# Altium PCB PCB3.PcbDoc
Units mil, origin at the board's own origin, x right, y up, seen from the top; angles counter-clockwise.
Board outline 6000 x 4000 mil, 2 copper layers (Top Layer, Bottom Layer); 73 components, 49 nets, 212 pads, 52 vias.
Unrouted connection lines stored in the file: 2.
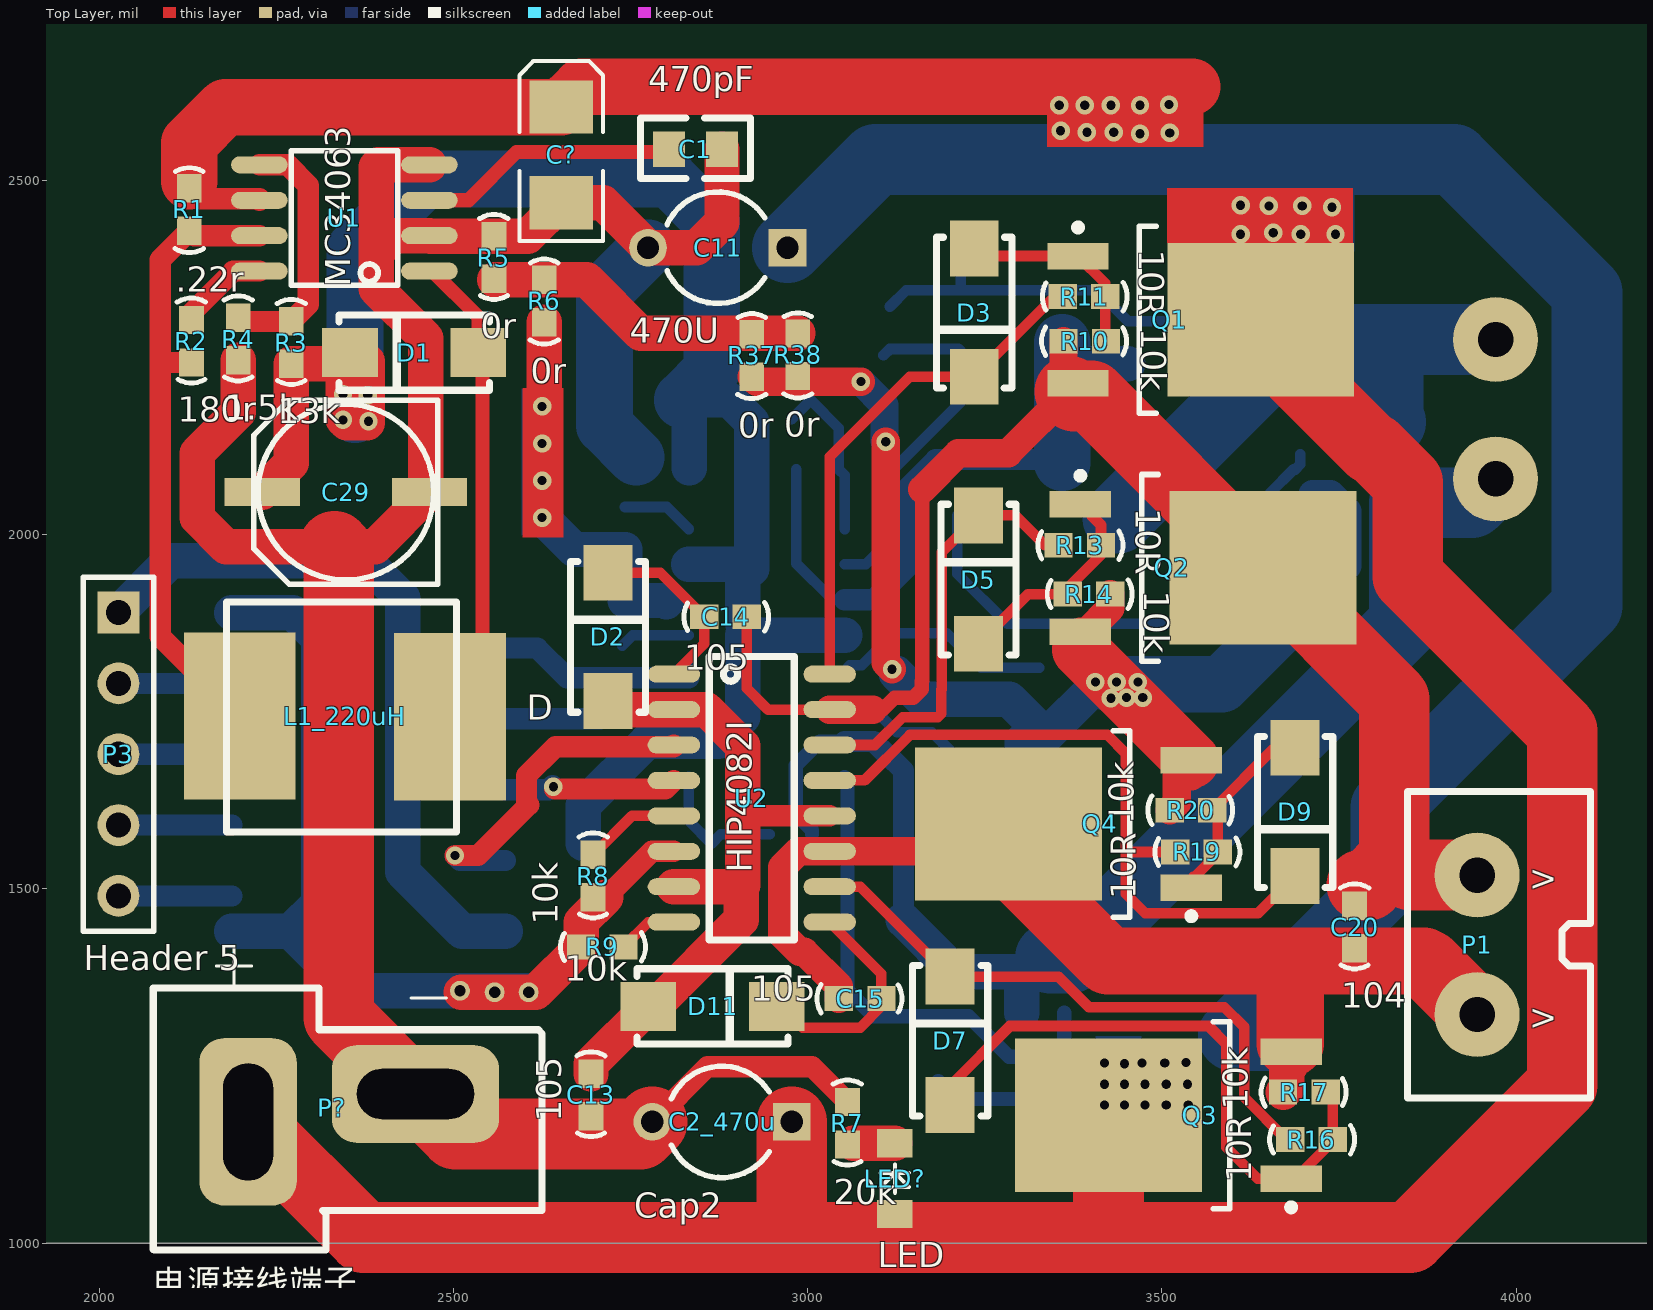
[diagram p0: Top Layer view]
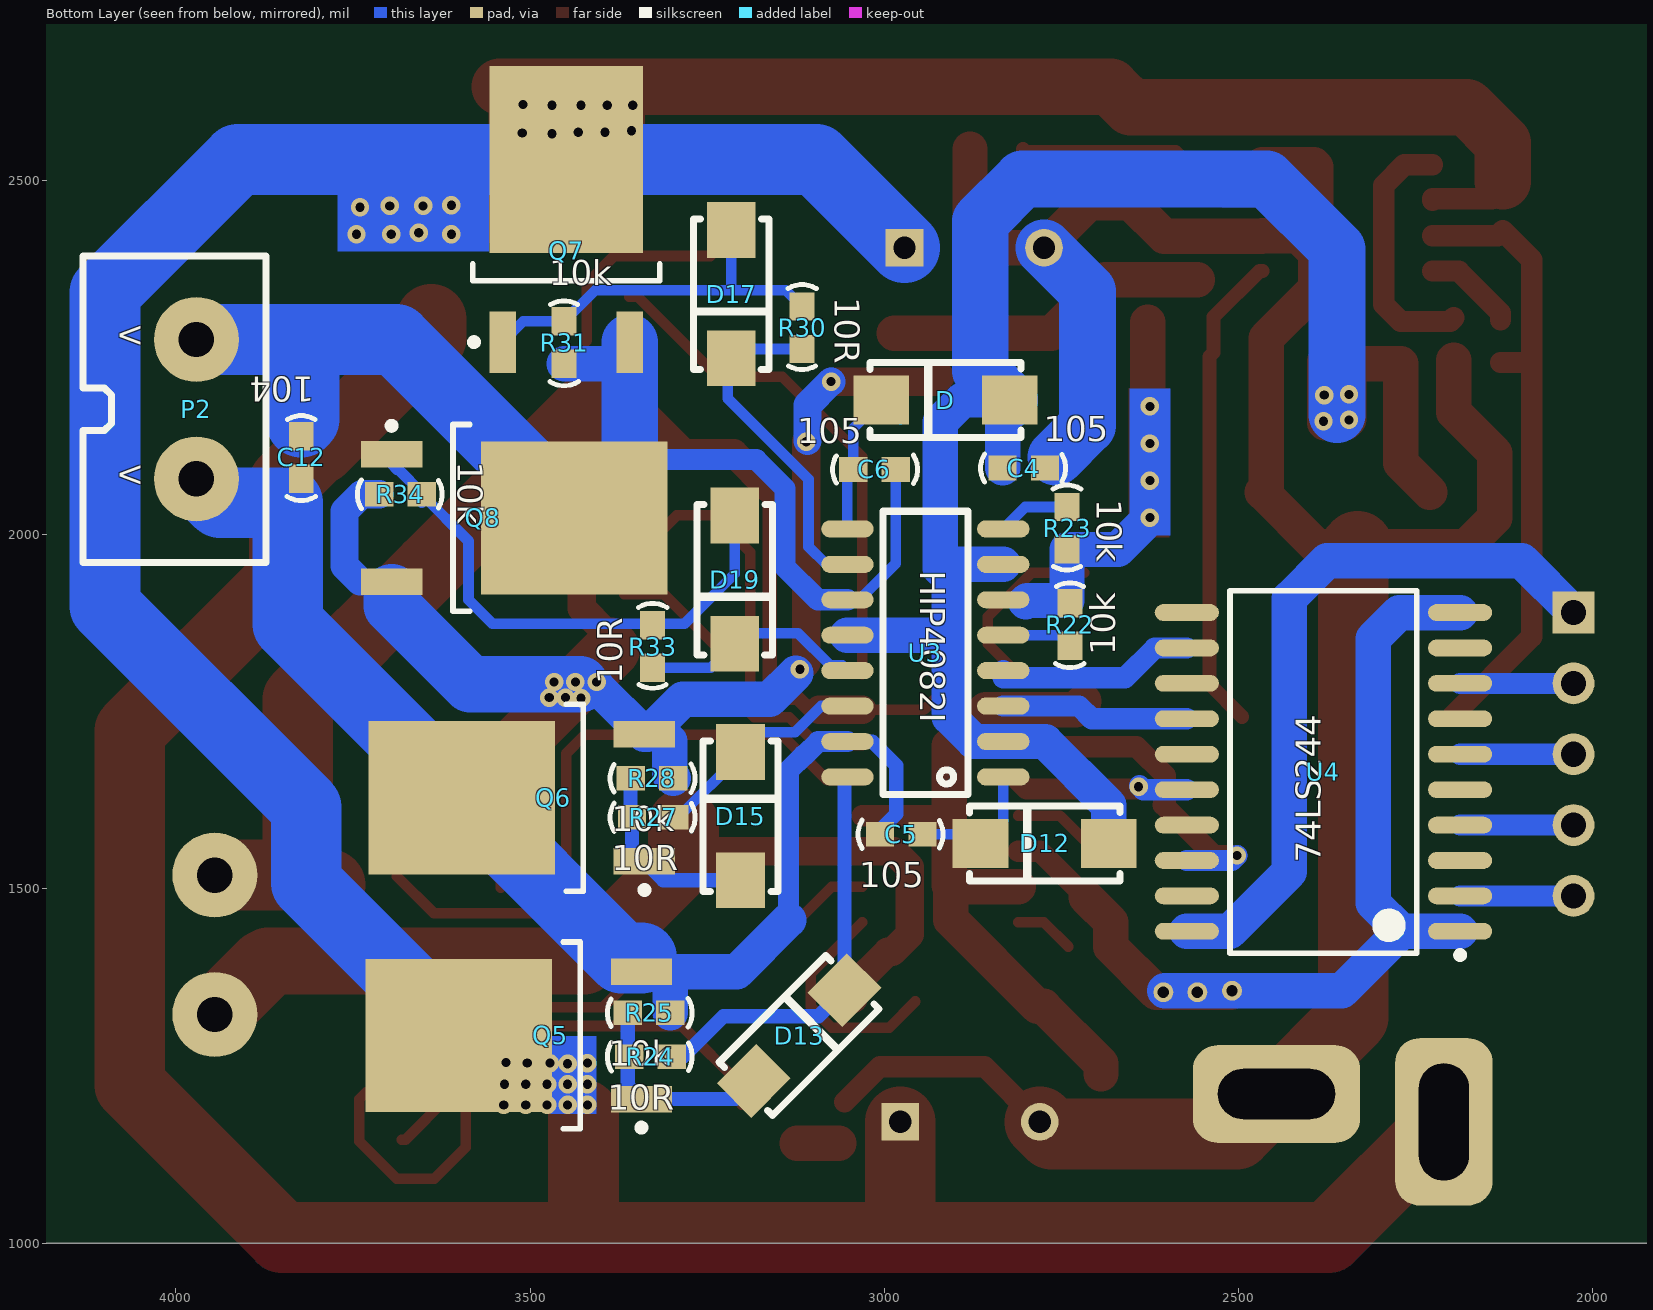
[diagram p1: Bottom Layer view, seen from below]
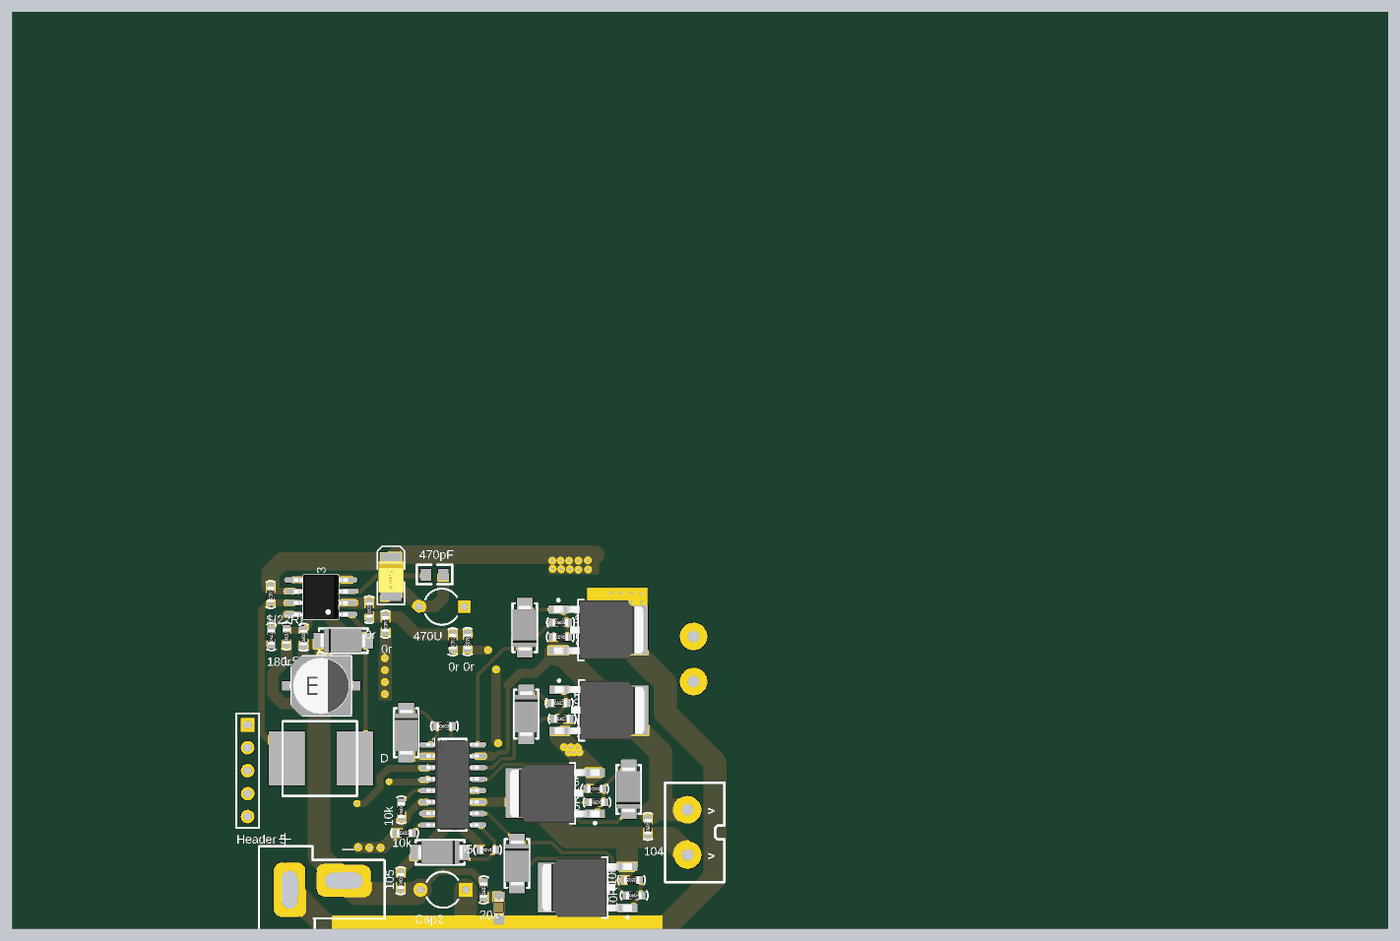
[diagram p2: 3D render of the assembled board from above, using the file's embedded part models]
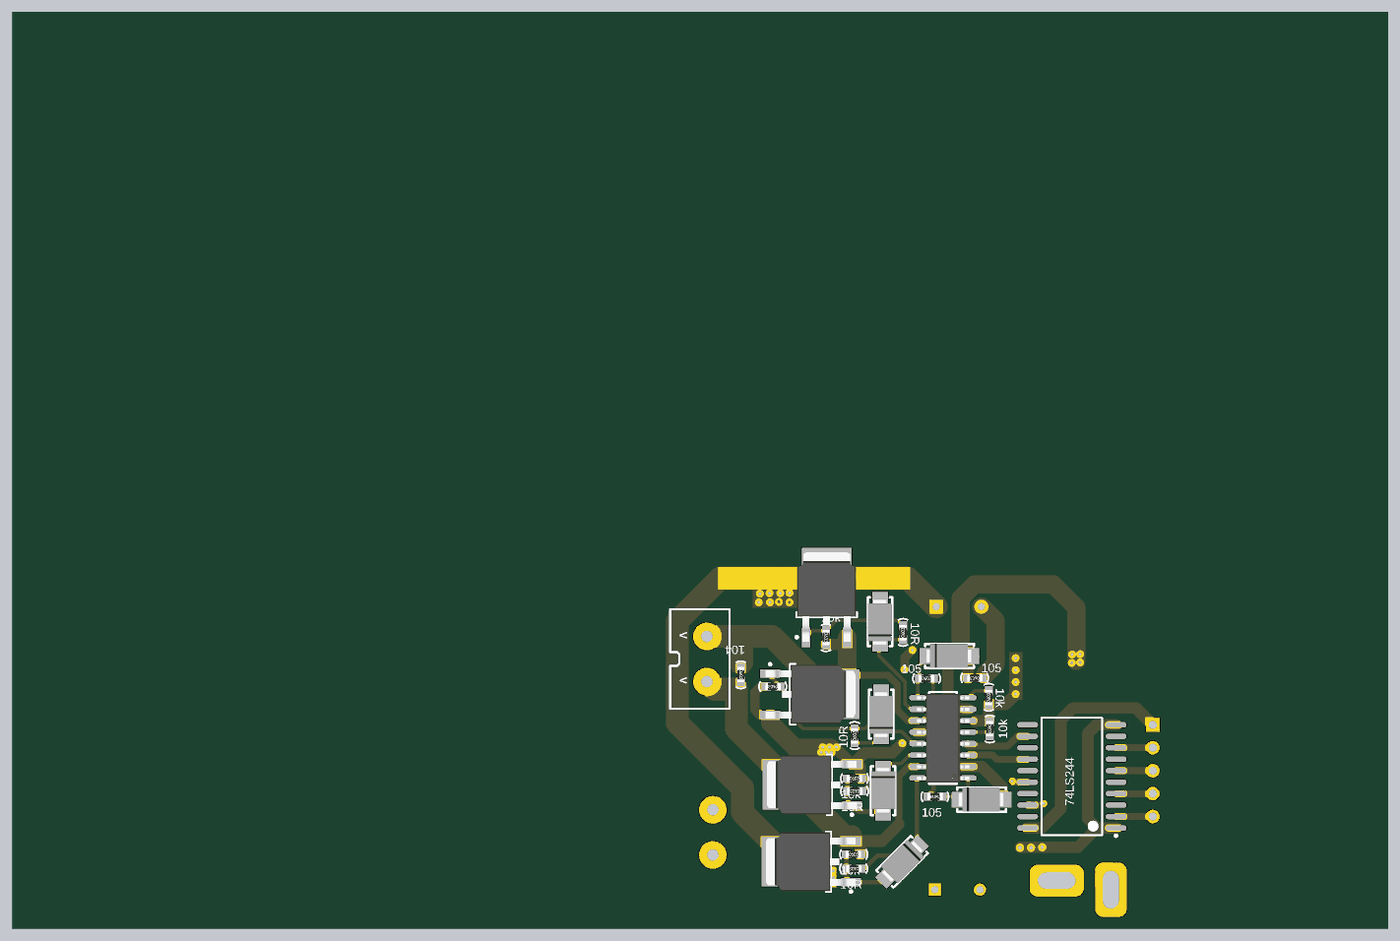
[diagram p3: 3D render of the assembled board from below, using the file's embedded part models]

## Layer stack, top to bottom
Top Solder: solder mask 0.4, Solder Resist, Dk 3.5
Top Layer: signal copper 1.4
Dielectric 1: dielectric 12.6, FR-4, Dk 4.8
Bottom Layer: signal copper 1.4
Bottom Solder: solder mask 0.4, Solder Resist, Dk 3.5

## Board outline
1000,1000 7000,1000 7000,5000 1000,5000

## Design rules (kind name [scope] priority, off if disabled: settings)
Clearance [All] p1: gap=10
PolygonConnect [All] p1: connectstyle=Relief reliefconductorwidth=10 reliefentries=4 polygonreliefangle="90 Angle" airgapwidth=10
RoutingVias [All] p1: holewidth=28 width=50 viastyle="Through Hole" minholewidth=28 minwidth=50 maxholewidth=28 maxwidth=50
SolderMaskExpansion [All] p1: expansion=4
Width [All] p1: maxlimit=150 minlimit=10 preferedwidth=10 minimp=50.000000 maximp=50.000000 favimp=50.000000
30 further rules are at their usual default settings.

## Components (designator, comment, footprint, x,y, rotation, side; value= is the part's Value field where it differs from the comment)
C1 "470pF" 0805 2804,2544 r0 top
C2_470u "Cap2" CAPR5-4X5 2879,1171 r180 top
C4 "105" 0603 2798,2094 r0 bottom
C5 "105" 0603 2971,1577 r0 bottom
C6 "105" 0603 3019,2092 r180 bottom
C11 "470U" CAPR5-4X5 2873,2405 r180 top
C12 "104" 0603 3823,2114 r270 bottom
C13 "105" 0603 2694,1204 r90 top
C14 "105" 0603 2879,1884 r0 top
C15 "105" 0603 3079,1345 r180 top
C20 "104" 0603 3772,1441 r90 top
C29 "" ED6.3 2348,2060 r0 top
C? "" "pol cap(10uF)" 2582,2416 r90 top
D "二极管" 二极管 2918,2190 r0 bottom
D1 "二极管" 二极管 2440,2257 r180 top
D2 "D" 二极管 2718,1860 r90 top
D3 "二极管" 二极管 3235,2309 r270 top
D5 "二极管" 二极管 3241,1941 r90 top
D7 "二极管" 二极管 3201,1290 r90 top
D9 "二极管" 二极管 3688,1604 r270 top
D11 "二极管" 二极管 2870,1334 r0 top
D12 "二极管" 二极管 2778,1564 r0 bottom
D13 "二极管" 二极管 3117,1296 r135 bottom
D15 "二极管" 二极管 3203,1607 r90 bottom
D17 "二极管" 二极管 3216,2335 r270 bottom
D19 "二极管" 二极管 3211,1932 r270 bottom
L1_220uH "Inductor" 电感8*8 2198,1744 r90 top
LED? "LED" LED(0805) 3123,1091 r90 top
P1 "" 接线端子 3840,1201 r90 top
P2 "" 接线端子 3866,2397 r270 bottom
P3 "Header 5" HDR1X5 2027,1890 r270 top
P? "电源接线端子" T型接头 2315,1201 r0 top
Q1 "IR7843" "TO-252  mos管" 3554.81,2303.49 r0 top
Q2 "IR7843" "TO-252  mos管" 3558,1953 r0 top
Q3 "IR7843" "TO-252  mos管" 3509.19,1180.51 r180 top
Q4 "IR7843" "TO-252  mos管" 3368.19,1591.51 r180 top
Q5 "IR7843" "TO-252  mos管" 3516,1293 r0 bottom
Q6 "IR7843" "TO-252  mos管" 3511.81,1628.49 r0 bottom
Q7 "IR7843" "TO-252  mos管" 3449,2445 r90 bottom
Q8 "IR7843" "TO-252  mos管" 3522.19,2023.51 r180 bottom
R1 ".22r" 0603 2127,2464 r270 top
R2 "180r" 0603 2130,2268 r90 top
R3 "13k" 0603 2271,2266 r90 top
R4 "1.5k" 0603 2196,2271 r90 top
R5 "0r" 0603 2557,2386 r90 top
R6 "0r" 0603 2628,2335 r270 top
R7 "20k" 0603 3056,1164 r90 top
R8 "10k" 0603 2697,1513 r90 top
R9 "10k" 0603 2705,1418 r0 top
R10 "10k" 0603 3396,2273 r180 top
R11 "10R" 0603 3385,2336 r0 top
R13 "10R" 0603 3379,1985 r0 top
R14 "10k" 0603 3392,1916 r0 top
R16 "10R" 0603 3706,1146 r0 top
R17 "10k" 0603 3706,1213 r180 top
R19 "10R" 0603 3544,1552 r0 top
R20 "10k" 0603 3546,1611 r180 top
R22 "10k" 0603 2738,1878 r270 bottom
R23 "10k" 0603 2742,2004 r90 bottom
R24 "10R" 0603 3325,1263 r0 bottom
R25 "10k" 0603 3337,1325 r180 bottom
R27 "10R" 0603 3321,1601 r0 bottom
R28 "10k" 0603 3333,1656 r180 bottom
R30 "10R" 0603 3116,2287 r90 bottom
R31 "10k" 0603 3452,2276 r270 bottom
R33 "10R" 0603 3327,1837 r90 bottom
R34 "10k" 0603 3678,2057 r0 bottom
R37 "0r" 0603 2921,2258 r270 top
R38 "0r" 0603 2986,2259 r270 top
U1 "MC34063" SO8NB 2346,2447 r90 top
U2 "HIP4082I" HIP4082I 2921,1643 r0 top
U3 "HIP4082I" HIP4082I 2942,1818 r0 bottom
U4 "74LS244" 74LS244D 2380,1665 r0 bottom

## Footprints (in the part's own frame and the unit in brackets; to place one, negate y for a bottom-side part, rotate by r counter-clockwise, add the part's x,y. Pads: shape width x height; smd on the part's side, far side on the other; paste and mask are expansions set on the pad)
74LS244D [mm] "SOP-20"
  oval 2.3x0.6 smd: 1(-4.9,5.715) 2(-4.9,4.445) 3(-4.9,3.175) 4(-4.9,1.905) 5(-4.9,0.635) 6(-4.9,-0.635) 7(-4.9,-1.905) 8(-4.9,-3.175) 9(-4.9,-4.445) 10(-4.9,-5.715) 11(4.9,-5.715) 12(4.9,-4.445) 13(4.9,-3.175) 14(4.9,-1.905) 15(4.9,-0.635) 16(4.9,0.635) 17(4.9,1.905) 18(4.9,3.175) 19(4.9,4.445) 20(4.9,5.715)
  silkscreen extent -5.02,-6.5 3.35,6.69, body extent -3.8,-6.5 3.8,6.5, height 2.65
0603 [mil]
  rect 40x35 smd: 1(-25,0) 2(35,0)
  silkscreen extent -54,-20 66,20, body extent -28,-16 38,16, height 22
0805 [mil] "Chip Inductor, Body 0.6x0.3mm, IPC High Density"
  rect 45x50 smd: 1(0,0) 2(75,0)
  silkscreen extent -40,-41 115,44
CAPR5-4X5 [mm] "Capacitor; 2 Leads"
  rect 1.35x1.35 hole 0.8: 1(-2.5,0)
  round 1.35 hole 0.8: 2(2.5,0)
  silkscreen extent -1.69,-2 1.82,2
ED6.3 [mm]
  rect 2.7x1 smd: 1(-3,0) 2(3,0)
  silkscreen extent -3.3,-3.3 3.3,3.3, body extent -3.5,-3.3 3.5,3.3, height 5.2
HDR1X5 [mm] "Connector; Header; 5 Position"
  rect 1.5x1.5 hole 0.9: 1(0,0)
  round 1.5 hole 0.9: 2(2.54,0) 3(5.08,0) 4(7.62,0) 5(10.16,0)
  silkscreen extent -1.27,-1.27 11.43,1.27
HIP4082I [mil]
  oval 74x24 smd: 1(-110,160) 2(-110,110) 3(-110,60) 4(-110,10) 5(-110,-40) 6(-110,-90) 7(-110,-140) 8(-110,-190) 9(110,-190) 10(110,-140) 11(110,-90) 12(110,-40) 13(110,10) 14(110,60) 15(110,110) 16(110,160)
  silkscreen extent -60,-215 60,185, body extent -115,-207 113,179, height 69
LED(0805) [mil]
  rect 40x50 smd: 1(-50,0) 2(50,0)
  silkscreen extent -20,-20 20,20, body extent -37,-24 43,25, height 43
"pol cap(10uF)" [mil]
  rect 75x90 smd: 1(187.5,-70) 2(52.5,-70)
  silkscreen extent -1,-129 253,-11, body extent 51,-125 189,-15, height 75
SO8NB [mil]
  oval 24x80 smd: 1(-75,-120) 2(-25,-120) 3(25,-120) 4(75,-120) 5(75,120) 6(25,120) 7(-25,120) 8(-75,120)
  silkscreen extent -95,-75 95,75, body extent -97,-118 96,118, height 61
"TO-252  mos管" [mm]
  rect 2.2x0.95 smd: 1(-4.4,2.28) 3(-4.4,-2.28)
  rect 6.7x5.5 smd: 2(2.15,0)
  silkscreen extent -4.52,-3.35 -1.6,3.43, body extent -4.9,-3.27 5.04,3.27, height 2.39
T型接头 [mm]
  rrect50% 3.5x6 hole 1.8 slot 4.2 at 90 deg: 1(-2.667,-0.762)
  rrect50% 6x3.5 hole 1.8 slot 4.2 at 0 deg: 2(3.333,0.238)
  silkscreen extent -6.07,-5.36 7.87,5.46
二极管 [mm] "SS-14/M7"
  rect 2x1.75 smd: 1(-2.413,0) 2(2.187,0)
  silkscreen extent -2.81,-1.35 2.59,1.35, body extent -2.61,-1.34 2.49,1.33, height 2.12
接线端子 [mil]
  round 120 hole 50: 1(121.57,-105) 2(318.43,-105)
  silkscreen extent 3,-265 437,-7
电感8*8 [mm]
  rect 6x4 smd: 1(0,0) 2(-0.025,-7.544)
  silkscreen extent -4.17,-7.77 4.09,0.48

## Part data
C1: library part Cap, "Capacitor"
C2_470u: "Capacitor"
C4 C5 C6 C12 C13 C14 C15 C20: library part Cap, "无极电容"
C11: library part Cap2, "Capacitor"
C29: library part 固态贴片电容, "ED8:470UF  ED6.3:100UF"
C?: library part "pol cap", "通用有极电容"
D2: library part 二极管
LED?: "发光二极管"
P1 P2: library part 接线端子
P3: "Header, 5-Pin"
P?: "电源线"
Q1 Q2 Q3 Q4 Q5 Q6 Q7 Q8: library part NMOS-2, "N-Channel Power MOSFET"
R1 R2 R3 R4 R5 R6 R7 R8 R9 R10 R11 R13 R14 R16 R17 R19 R20 R22 R23 R24 R25 R27 R28 R30 R31 R33 R34 R37 R38: library part R

## Free pads (board coordinates)
  round 28 hole 16: 0(2509,1356) 1(2558,1354) 2(2606,1354)

## Via types
v1: diameter 26, hole 13, Top Layer to Bottom Layer, 52 vias

## Nets (pads, with @x,y where several pads share a name; then routed paths per layer and width w, separated by ;. In a path a pad name is that pad's centre, name@x,y a point inside that pad or via, vN(x,y) a via of type N, cw(c..) or ccw(c..) an arc to the next point about the centre after c; other vN are vias at no path point)
5V: P3.1 U4.20 | length 1018.9
  Bottom Layer w50: P3.1 2100,1963 2375,1963 2428,1910 2428,1524 2512,1440 U4.20
12V: C4.2 C13.2 C29.1 D1.2 D2.1 D11.1 D12.1 D.1 R3.1 U2.2 U2.7 U2.12 U3.2 U3.7 U3.12 | length 3759.3
  Top Layer w30: 2914,1603 U2.12
  Top Layer w50: C29.1 2271,2101.11 R3.1 D1.2@2324.9,2241 ; C13.2 2694,1253 D11.1 2783.47,1334 2906,1456.53 2906,1503 ; D2.1 2730,1753 U2.2 2857,1753 2908,1702 2908,1609 ; U2.7 2906,1503 ; 2914,1603 2908,1609 ; 2906,1503 2908,1505 2908,1609 ; v1@2344,2163 v1(2344,2198) 2344,2247.1 D1.2 2366,2257 2378,2245 2378,2158 2349,2158 v1@2344,2163
  Bottom Layer w50: D12.1 2683,1618 2773,1708 U3.2 2873.47,1708 2908,1742.53 2908,1858 U3.12 ; D.1 D.1@2833,2190 ; U3.7 2915,1958 2908,1951 2908,1875 2921,1862 ; C4.2 D.1@2833,2190 ; 2921,1952 2921,2159 2890,2190 D.1@2833,2190
  Bottom Layer w80: 2361,2169 2361,2403 2460,2502 2804.85,2502 2864.57,2442.28 2864.57,2231.57 D.1
  other v1: 2380,2160 2344,2162 2379,2197
AGND: C1.2 C2_470u.2 C4.1 C11.2 C13.1 C29.2 C?.2 P?.2 R4.1 R5.2 R7.2 U1.2 U1.4 | length 3794.8
  Top Layer w30: C2_470u.2 2858.57,1249 3006,1249 R7.2
  Top Layer w50: R4.1 2196,2173 2138,2115 2138,2024 2179,1983 2332,1983 2389.11,1983 C29.2 2460.63,2065.48 2460.63,2277.37 2391,2347 2391,2398 ; U1.4 2394,2522 2391,2519 2391,2398 ; C13.1 2702,1171 C2_470u.2 ; C1.2 2879,2441 2843,2405 C11.2 2711.07,2468.5 C?.2 2604.5,2421 R5.2 2467,2421 U1.2 2415,2422 2391,2398
  Top Layer w100: 2332,1983 2338,1977 2338,1318.59 P?.2 2502.59,1154 2763.57,1154 C2_470u.2
  Bottom Layer w80: C4.1@2758,2109 2713,2154 2713,2343.43 C11.2
DGND: pad.0 pad.1 pad.2 R6.2 R8.1 R9.1 R22.1 R23.1 U2.6 U3.6 U4.1 U4.10 | length 1810.7
  Top Layer w30: 2715,1488 2780,1553 U2.6
  Top Layer w50: pad.0@2511,1354 pad.1 pad.2 2616,1354 R9.1 2680,1453 2715,1488 ; v1@2628,2184 R6.2
  Bottom Layer w30: R22.1 R22.1@2742,1907
  Bottom Layer w50: U4.1 2270,1440 ; U4.10 2273,1890 2310,1853 2310,1480 2270,1440 ; pad.2@2604,1356 pad.0 2354,1356 2270,1440 ; v1(2625,2024) 2670,1979 R23.1 2742,1907 2798.15,1907 U3.6@2800.15,1905
  other v1: 2625,2076.33 2625,2128.67 2625,2181
GND: R5.1 R6.1 R37.1 R38.1 | length 460.9
  Top Layer w20: R5.1 R5.1@2558,2362
  Top Layer w50: R5.1@2558,2360 R6.1 2688,2360 2764,2284 R38.1
NetC1_1: C1.1 U1.3 | length 367.8
  Top Layer w20: U1.3 2521,2472 2589,2540 2800,2540 C1.1
NetC5_1: C5.1 D12.2 U3.1 | length 194.6
  Bottom Layer w15: U3.1 2832,1596.1 D12.2 2877.1,1577 C5.1
NetC5_2: C5.2 C12.2 P2.2 Q5.3 Q6.2 R25.2 U3.15 | length 1779.3
  Bottom Layer w20: C5.2 3006,1582.78 2983,1605.78 2983,1674 3017,1708 U3.15
  Bottom Layer w30: U3.15 3093.04,1708 3112.54,1688.5 3113.5,1688.5 3135,1667 3135,1456
  Bottom Layer w50: 3135,1456 3208.24,1382.76 3312.76,1382.76 3302,1372 R25.2
  Bottom Layer w100: 3342.77,1402.5 3370.47,1402.5 Q6.2 3842,1874.03 3842,2045 3937.43,2045 P2.2
NetC6_1: C6.1 D.2 U3.9 | length 240.2
  Bottom Layer w15: D.2@2977,2162.9 D.2 3044,2150.1 C6.1 3052,2084 U3.9
NetC6_2: C6.2 C12.1 P2.1 Q7.3 Q8.2 R31.2 U3.11 | length 1665.9
  Bottom Layer w15: C6.2 2984,1959.28 3035.28,1908 U3.11
  Bottom Layer w30: U3.11 3094,1908 3140,1954 3140,2065.17 3180.83,2106 3355.05,2106 Q8.2@3359.24,2101.82
  Bottom Layer w50: 3390.01,2241 R31.2
  Bottom Layer w80: Q8.2@3359.24,2101.82 Q7.3
  Bottom Layer w100: Q8.2 3689.46,2275.43 3819,2275.43 ; 3823,2159 3819,2163 3819,2275.43 ; P2.1 3819,2275.43
NetC14_1: C14.1 D2.2 U2.1 | length 260.5
  Top Layer w15: D2.2 2791.9,1946.1 C14.1 2854,1846 U2.1
NetC14_2: C14.2 C20.2 P1.2 Q1.3 Q2.2 R10.2 U2.15 | length 2037.1
  Top Layer w15: C14.2 2914,1783 2944,1753 U2.15
  Top Layer w20: 3091.74,1753 3105.88,1753 3122.66,1769.78 3149,1769.78 3161,1781.78 3161,1793.13 3161.55,1793.68 3161.55,2063.9
  Top Layer w40: U2.15 3091.74,1753 ; 3161.55,2063.9 3212.65,2115 3282.86,2115 3369.75,2201.89 Q1.3 3361,2234.31 R10.2
  Top Layer w100: Q1.3@3369.75,2201.89 3376.15,2195.5 3400.15,2195.5 Q2.2 3828,1767.65 3828,1528 ; 3782.45,1505.55 3791,1505.55 3828,1542.55 ; 3851.12,1519.43 P1.2
NetC15_1: C15.1 D11.2 U2.9 | length 324.9
  Top Layer w15: D11.2@2956.1,1341 2993.1,1304 3074,1304 3104,1334 C15.1 3104,1380 U2.9
NetC15_2: C15.2 C20.1 P1.1 Q3.3 Q4.2 R17.2 U2.11 | length 1506.8
  Top Layer w40: C15.2 3044,1362.35 2995.35,1411 2988.6,1411 2964,1435.6 2964,1530.4 2986.6,1553 U2.11 Q4.2@3245.03,1553
  Top Layer w50: R17.2 3676,1218 3676,1245 3681,1250 Q3.3@3681,1281.82
  Top Layer w95: Q4.2@3283.54,1538.46 3423.95,1398.05 3679,1398.05 ; Q3.3@3681,1281.82 3681,1396.05 3679,1398.05 ; 3875.57,1392 3869.53,1398.05 3679,1398.05
  Top Layer w100: Q4.2@3283.54,1538.46 Q4.2 ; 3875.57,1392 P1.1
NetD1_1: D1.1 L1_220uH.2 U1.1 | length 681.5
  Top Layer w20: U1.1 2470,2372 2535,2307 D1.1 2541,2251 2541,1789 L1_220uH.2
NetD3_1: D3.1 Q1.1 R10.1 R11.2 | length 287.6
  Top Layer w15: D3.1 3245.75,2393.25 Q1.1 3420,2354.84 R11.2 3420,2274 R10.1
NetD3_2: D3.2 R11.1 U2.16 | length 729.6
  Top Layer w15: U2.16 3031,2110 3143.9,2222.9 D3.2 3348.1,2336 R11.1
NetD5_1: D5.1 Q2.1 R13.2 R14.1 | length 313.3
  Top Layer w15: D5.1 3311,1916 R14.1 3367,1924.75 3414,1971.75 R13.2 3414,2013.54 Q2.1
NetD5_2: D5.2 R13.1 U2.14 | length 607.7
  Top Layer w15: U2.14 3094.77,1703 3134.05,1742.28 3183.31,1742.28 3188.5,1747.47 3188.5,1781.18 3189.05,1781.74 3189.05,1975.15 D5.2 3292.9,2027.1 3335,1985 R13.1
NetD7_1: D7.1 Q3.1 R16.2 R17.1 | length 872
  Top Layer w15: D7.1 3201,1221.88 3285.4,1306.28 3565.72,1306.28 3591,1281 3591,1135 3635.25,1090.75 Q3.1 3688,1090.75 3741,1143.75 R16.2 3741,1203 R17.1
NetD7_2: D7.2 R16.1 U2.10 | length 856
  Top Layer w15: U2.10 3074.1,1503 D7.2 3353.97,1376.1 3397.03,1333.05 3587.95,1333.05 3616,1305 3616,1205.75 3675.75,1146 R16.1
NetD9_1: D9.1 Q4.1 R19.2 R20.1 | length 282.9
  Top Layer w15: Q4.1 3541.42,1514.42 3544,1517 3546.25,1517 3579,1549.75 R19.2 3579,1603 R20.1 3659,1699 D9.1
NetD9_2: D9.2 R19.1 U2.13 | length 997.1
  Top Layer w15: U2.13 3080.12,1653 3144.06,1716.94 ; 3144.4,1717.28 3422.68,1717.28 3449,1690.96 3449,1557 ; R19.1 3454,1552 3449,1557 ; D9.2 3635.65,1465.55 3476.45,1465.55 3449,1493 3449,1557
NetD13_1: D13.1 Q5.1 R24.2 R25.1 | length 298.9
  Bottom Layer w20: D13.1 3209.76,1203.24 Q5.1 3362,1222.46 R25.1
NetD13_2: D13.2 R24.1 U3.16 | length 585.6
  Bottom Layer w20: U3.16 3056.12,1653.88 D13.2 3093,1320 3227,1320 3284,1263 R24.1
NetD15_1: D15.1 Q6.1 R27.2 R28.1 | length 272
  Bottom Layer w20: D15.1 3311.86,1512 Q6.1 3356,1556.14 R27.2 3358,1603 R28.1
NetD15_2: D15.2 R27.1 U3.14 | length 311.6
  Bottom Layer w15: U3.14 3089,1758 3126,1721 3175.1,1721 D15.2 3203,1688.75 3290.75,1601 R27.1
NetD17_1: D17.1 Q7.1 R30.2 R31.1 | length 548.5
  Bottom Layer w15: R30.2 3139,2345 3214,2345 ; D17.1 3216,2347 3214,2345 ; Q7.1 3509.54,2301 R31.1 3408,2345 3214,2345
NetD17_2: D17.2 R30.1 U3.10 | length 504.6
  Bottom Layer w15: U3.10 3082,1958 3107,1983 3107,2078.14 3221,2192.14 3221,2253.9 3212.9,2262 R30.1 R30.1@3107,2253
NetD19_1: D19.1 Q8.1 R33.2 R34.1 | length 765
  Bottom Layer w15: D19.1 3211,1945 3282,1874 3552.94,1874 3586.93,1908 3586.93,1990.93 R34.1 ; R34.1@3653,2045 R34.1 ; Q8.1 3695.42,2099.42 3688,2092 3685.75,2092 3653,2059.25 R34.1
NetD19_2: D19.2 R33.1 U3.13 | length 317.2
  Bottom Layer w15: U3.13 3059.5,1815.5 3076.22,1815.5 3121.72,1861 3195.9,1861 D19.2 3244.9,1812 R33.1
NetL1_220uH_1: L1_220uH.1 R1.2 R2.1 U1.7 | length 897.6
  Top Layer w30: R2.1 2094,2243 2086,2251 ; L1_220uH.1 2086,1856 2086,2251 ; U1.7 2134,2422 R1.2 2086,2388 2086,2251
NetLED?_2: LED?.2 R7.1 | length 58.6
  Top Layer w50: R7.1@3064.43,1141 LED?.2
NetR2_2: R2.2 U1.8 | length 130.4
  Top Layer w30: R2.2 2130,2312.86 2189.14,2372 U1.8
NetR3_2: R3.2 R4.2 U1.5 | length 360
  Top Layer w30: R4.2 2201,2301 R3.2 2295,2325 2295,2493 2266,2522 U1.5
NetR8_2: R8.2 U2.5 | length 137.3
  Top Layer w15: R8.2 2752,1603 U2.5 U2.5@2811,1603.5
NetR9_2: R9.2 U2.8 | length 85.5
  Top Layer w15: R9.2 2775,1453 U2.8
NetR22_2: R22.2 U3.5 | length 100.2
  Bottom Layer w15: R22.2 2753,1858 U3.5
NetR23_2: R23.2 U3.8 | length 102.8
  Bottom Layer w15: R23.2 2801,2039 U3.8
PGND: Q2.3 Q4.3 Q6.3 Q8.3 R14.2 R20.2 R28.2 R34.2 R37.2 R38.2 | length 1893.8
  Top Layer w40: R37.2 2928,2216 v1(3075,2216) ; v1(3110,2131) 3110,1819 v1(3119,1810) ; 3384.77,1837.92 Q2.3 3394.16,1863.24 3427,1896.07 R14.2 ; R20.2 3521,1621 3521,1658.5 3541.42,1658.5 Q4.3
  Top Layer w80: 3384.77,1837.92 Q4.3
  Bottom Layer w40: v1(3075,2216) 3108.42,2182.58 v1@3108.42,2132.58 ; R34.2 3738,2057 3762,2033 3762,1956.07 3739.67,1933.75
  Bottom Layer w50: v1@3124.91,1804.09 3161.53,1767.47 3284.53,1767.47 3333.75,1718.25 Q6.3 v1@3406,1785.67 ; R28.2 3303,1661 Q6.3@3303,1708.5
  Bottom Layer w80: v1@3429.08,1789 3584.61,1789 3695.42,1899.81 Q8.3@3695.42,1918.5
  other v1: 3428,1769 3450,1770 3473,1770 3406,1792 3436,1792 3466,1792
PWM1: P3.5 U4.2 | length 160.1
  Bottom Layer w30: P3.5 U4.2
PWM2: P3.4 U4.4 | length 160.1
  Bottom Layer w30: P3.4 U4.4
PWM3: P3.3 U4.6 | length 160.1
  Bottom Layer w30: P3.3 U4.6
PWM4: P3.2 U4.8 | length 160.1
  Bottom Layer w30: P3.2 U4.8
PWMOUT1: U2.3 U4.18 | length 477.3
  Top Layer w30: v1(2502,1547) 2534.57,1547 2606,1618.43 2603,1621.43 2603,1659.74 2643.89,1700.63 2811,1700.63 U2.3
  Bottom Layer w30: v1(2502,1547) 2509,1540 U4.18
PWMOUT2: U2.4 U4.16 | length 241.9
  Top Layer w30: v1@2643,1641 2799,1641 U2.4
  Bottom Layer w30: U4.16 2634.29,1640 v1@2639.64,1645.36
  other v1: 2641,1644
PWMOUT3: U3.3 U4.14 | length 266.5
  Bottom Layer w30: U4.14 2707,1740 2725,1758 U3.3
PWMOUT4: U3.4 U4.12 | length 286.5
  Bottom Layer w30: U4.12 2618,1840 2660,1798 2832,1798 U3.4
VCC: C2_470u.1 C11.1 C?.1 LED?.1 P?.1 Q1.2 Q3.2 Q5.2 Q7.2 R1.1 U1.6 | length 7783.4
  Top Layer w30: R1.1 2142,2474 2226,2474 U1.6
  Top Layer w80: R1.1@2127,2499 2127,2553 2177.5,2603.5 C?.1 2680.5,2632 3543,2632
  Top Layer w100: P?.1 2373,1008 2981,1008 ; C2_470u.1 2977.43,1011.57 2981,1008 ; Q3.2 3424.54,1017.46 3434,1008 ; Q1.2 3639.46,2277.54 3795.73,2121.27 3799.39,2121.27 3847,2073.66 3847,1941 4065,1723 4065,1223 3850,1008 3434,1008 ; 2981,1008 3434,1008
  Bottom Layer w100: C11.1 3096.07,2529.65 Q7.2 3912.35,2529.65 4100,2342 4100,1899 3816,1615 3816,1508.35 Q5.2 Q5.2@3649,1293
  other v1: 3419,1195 3447,1195 3476,1195 3506,1195 3537,1195 3419,1224 3447,1224 3476,1224 3506,1224 3536,1224 3447,1253 3419,1254 3472,1254 3504,1254 3534,1255 3611,2424 3696,2424 3745,2424 3657,2426 3740,2462 3651,2464 3698,2464 3611,2465 3469,2566 3511,2567 3394,2568 3432,2568 3357,2570 3355,2606 3391,2606 3428,2606 3469,2606 3510,2607
pads on no net: U4.3 U4.5 U4.7 U4.9 U4.11 U4.13 U4.15 U4.17 U4.19

## Other copper
Top Layer:
  rectangle net VCC: 3338,2547 3559,2598
  rectangle net DGND: 2597,1996 2655,2207
  rectangle net VCC: 3507,2412 3770,2489
Bottom Layer:
  rectangle net VCC: 3406,1182 3471,1292
  rectangle net DGND: 2596,1999 2654,2206
  rectangle net VCC: 3558,2400 3772,2480

## Silkscreen, mask and mechanical layers (free items; w line width, h text height)
Top Solder:
  rectangle: 2394,958 3835,1059
  rectangle: 3505,2415 3773,2491
Bottom Solder:
  rectangle: 3085,2479 3922,2578

## Text inside footprints (layer, text, board x,y; h text height)
P1: Top Overlay "V" at 4063.11,1499.74 h50 r90; Top Overlay "V" at 4063.11,1302.89 h50 r90
P2: Bottom Overlay "V" at 4089.11,2098.26 h50 r90; Bottom Overlay "V" at 4089.11,2295.11 h50 r90